# Altium PCB MainPCB.PcbDoc
Units mil, origin at the board's own origin, x right, y up, seen from the top; angles counter-clockwise.
Board outline 3925 x 4850 mil, 2 copper layers (Top Layer, Bottom Layer); 57 components, 67 nets, 338 pads, 15 vias.
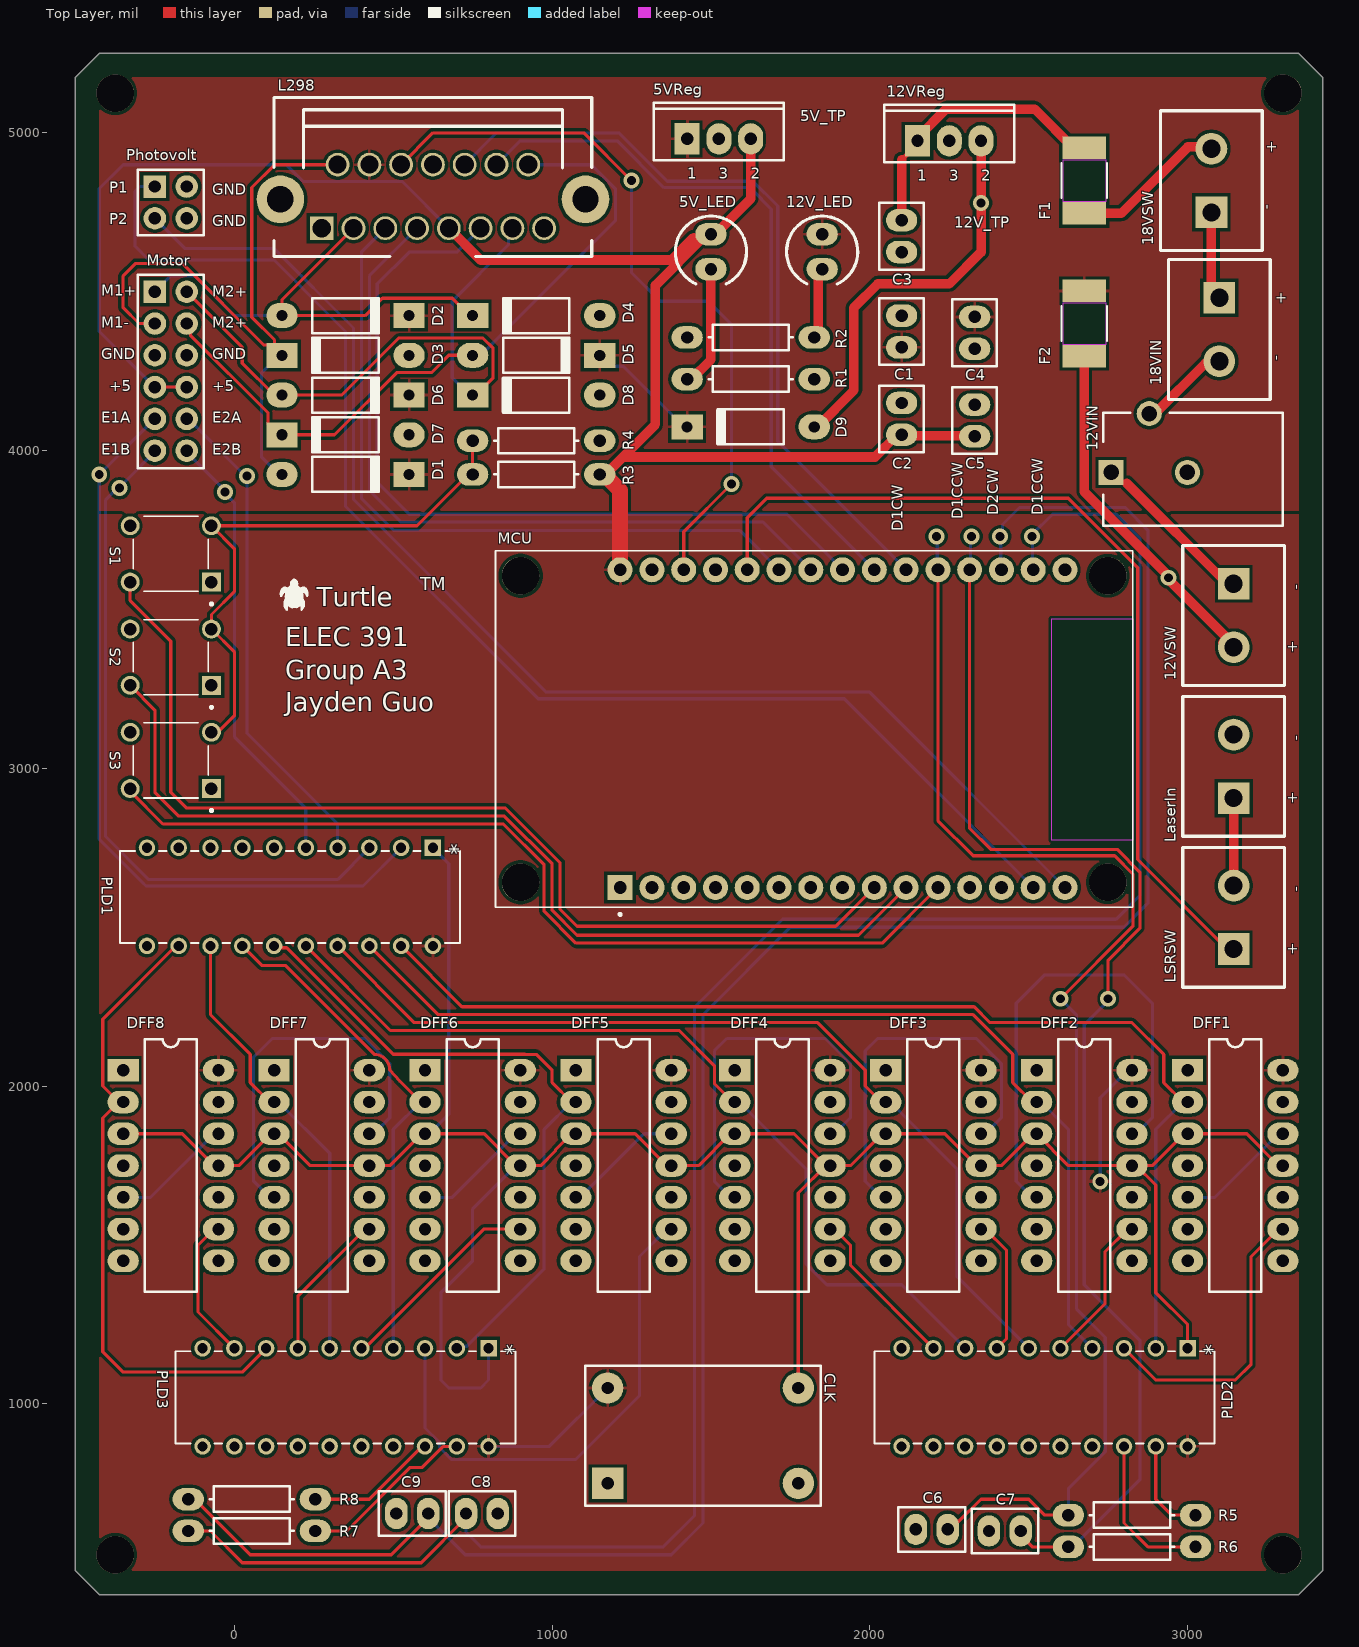
[diagram p0: Top Layer view]
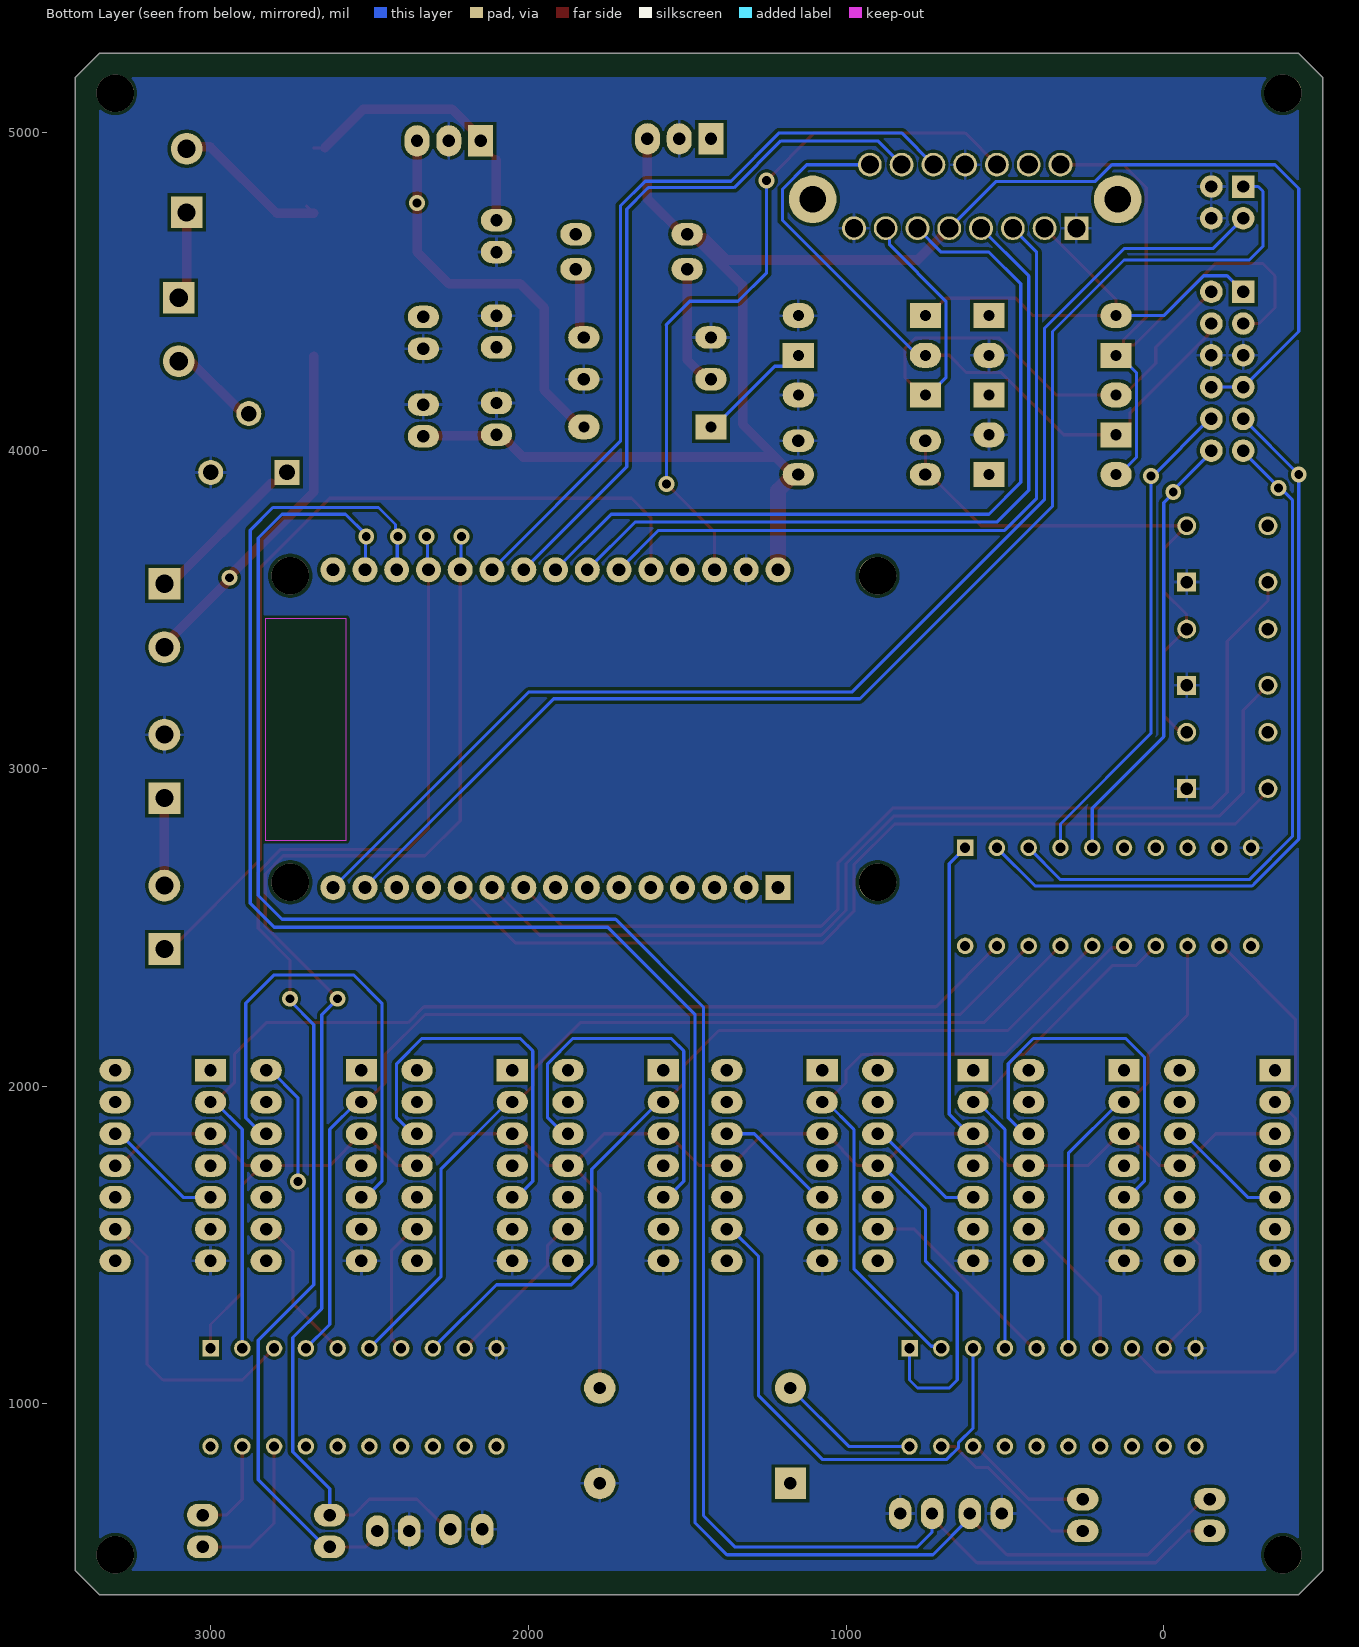
[diagram p1: Bottom Layer view, seen from below]

## Layer stack, top to bottom
Top Solder: solder mask 0.4, Solder Resist, Dk 3.5
Top Layer: signal copper 1.4
Dielectric 1: dielectric 12.6, FR-4, Dk 4.8
Bottom Layer: signal copper 1.4
Bottom Solder: solder mask 0.4, Solder Resist, Dk 3.5

## Board outline
3425,475 3350,400 -425,400 -500,475 -500,5175 -425,5250 3350,5250 3425,5175

## Design rules (kind name [scope] priority, off if disabled: settings)
AssemblyTestPointUsage [All] p1: valid=2
BoardOutlineClearance [All] p1: gap=10 ignorepadtopadclearanceinfootprint=FALSE
Clearance Clearance_5 [All] p1: gap=10 ignorepadtopadclearanceinfootprint=FALSE except(0: Arc-Hole Track-Hole SMDPad-Hole THPad-Hole Via-Hole Fill-Hole Poly-Hole Region-Hole Text-Hole)
Clearance Clearance_4 [All] p2: gap=10 ignorepadtopadclearanceinfootprint=FALSE except(0: Arc-Hole Track-Hole SMDPad-Hole THPad-Hole Via-Hole Fill-Hole Poly-Hole Region-Hole Text-Hole)
Clearance Clearance_3 [All] p3: gap=10 ignorepadtopadclearanceinfootprint=FALSE except(0: Arc-Hole Track-Hole SMDPad-Hole THPad-Hole Via-Hole Fill-Hole Poly-Hole Region-Hole Text-Hole)
Clearance Clearance_2 [All] p4: gap=10 ignorepadtopadclearanceinfootprint=FALSE except(0: Arc-Hole Track-Hole SMDPad-Hole THPad-Hole Via-Hole Fill-Hole Poly-Hole Region-Hole Text-Hole)
Clearance Clearance_1 [All] p5: gap=10 ignorepadtopadclearanceinfootprint=FALSE except(0: Arc-Hole Track-Hole SMDPad-Hole THPad-Hole Via-Hole Fill-Hole Poly-Hole Region-Hole Text-Hole)
Clearance [All] p6: gap=5 ignorepadtopadclearanceinfootprint=FALSE except(0: SMDPad-Hole THPad-Hole Via-Hole Fill-Hole Poly-Hole Region-Hole Text-Hole; 10: Arc-Fill Arc-Poly Arc-Region Track-Fill Track-Poly Track-Region SMDPad-Fill SMDPad-Poly SMDPad-Region THPad-Fill THPad-Poly THPad-Region Via-Fill Via-Poly Via-Region Fill-Fill Fill-Poly Fill-Region Poly-Poly Poly-Region Region-Region)
ComponentClearance [All] p1: gap=0 collisioncheckmode=3 verticalgap=0 showdistances=FALSE
FabricationTestPointUsage [All] p1: valid=2 allowmultiple=FALSE
FabricationTestPointUsage TestPointUsage [All] p2: valid=0 allowmultiple=FALSE
FabricationTestpoint Testpoint [All] p2: side=3 testpointundercomponent=TRUE minsize=40 maxsize=100 preferedsize=60 minholesize=0 maxholesize=40 preferedholesize=32 testpointgrid=1 allowsidetop=TRUE allowsidebottom=TRUE usegrid=TRUE gridtolerance=0.01
Height [All] p1: minheight=0 maxheight=2000 prefheight=500
HoleSize [All] p1: absolutevalues=TRUE maxlimit=1400 minlimit=12 maxpercent=80.000 minpercent=20.000
MinimumAnnularRing MinimumAnnularRing_Vias [IsVia] p1: minimumring=7
MinimumAnnularRing [All] p2: minimumring=7
MinimumSolderMaskSliver [All] p1: minsoldermaskwidth=5
PolygonConnect [All] p1: connectstyle=Relief reliefconductorwidth=10 reliefentries=4 polygonreliefangle="90 Angle" airgapwidth=10
RoutingVias [All] p1: holewidth=25 width=50 viastyle="Through Hole" minholewidth=12 minwidth=26 maxholewidth=25 maxwidth=50
SilkToSilkClearance [All] p1: silktosilkclearance=0
SilkToSolderMaskClearance SilkToCopperClearance [All] p1: minsilkscreentomaskgap=10 clearancetoexposedcopper=TRUE
SilkToSolderMaskClearance [All] p2: minsilkscreentomaskgap=5 clearancetoexposedcopper=FALSE
SilkToSolderMaskClearance SilkscreenOverComponentPads [IsPad] p3: minsilkscreentomaskgap=10 clearancetoexposedcopper=TRUE
SolderMaskExpansion [All] p1: expansion=4 istentingtop=FALSE
Width [All] p1: maxlimit=500 minlimit=5 preferedwidth=10
22 further rules are at their usual default settings.

## Components (designator, comment, footprint, x,y, rotation, side; value= is the part's Value field where it differs from the comment)
5V_LED "G-LED" LED_LGE1.0 1500,4626.25 r270 top
5VReg "Q-VReg5" TO220_XLGE1.2 1525,4981.25 r0 top
12V_LED "G-LED" LED_LGE1.0 1850,4626.25 r270 top
12VIN "C-Pwr" KLD_XLGE1.2 2879.37,4024 r180 top
12VReg "Q-VReg12" TO220_XLGE1.2 2250,4975 r0 top
12VSW "Term-Block 2" TERM-BLOCK-5.08MM-2POS 3145,3381.25 r270 top
18VIN "Term-Block 2" TERM-BLOCK-5.08MM-2POS 3100,4281.25 r270 top
18VSW "Term-Block 2" TERM-BLOCK-5.08MM-2POS 3075,4950 r90 top
C1 "G-Cap" Cap2.54mm_LGE1.0 2100,4375 r270 top value=100nF
C2 "G-Cap" Cap2.54mm_LGE1.0 2100,4100 r90 top value=100nF
C3 "G-Cap" Cap2.54mm_LGE1.0 2100,4675 r270 top value=100nF
C4 "G-Cap" Cap2.54mm_LGE1.0 2330,4370.82 r270 top value=100nF
C5 "G-Cap" Cap2.54mm_LGE1.0 2330,4095 r90 top value=100nF
C6 "G-Cap" Cap2.54mm_LGE1.0 2195,605 r180 top value=100nF
C7 "G-Cap" Cap2.54mm_LGE1.0 2425,600 r180 top value=100nF
C8 "G-Cap" Cap2.54mm_LGE1.0 779.18,655 r0 top value=100nF
C9 "G-Cap" Cap2.54mm_LGE1.0 560,655 r180 top value=100nF
CLK "D-XtalOsc" "4Lead Osc_LGE1.0" 1475,900 r0 top
D1 "1N4148" DO-41_XLGE1.2 350,3925 r0 top
D2 "1N4148" DO-41_XLGE1.2 350,4425 r0 top
D3 "1N4148" DO-41_XLGE1.2 350,4300 r180 top
D4 "1N4148" DO-41_XLGE1.2 950,4425 r180 top
D5 "1N4148" DO-41_XLGE1.2 950,4300 r0 top
D6 "1N4148" DO-41_XLGE1.2 350,4175 r0 top
D7 "1N4148" DO-41_XLGE1.2 350,4050 r180 top
D8 "1N4148" DO-41_XLGE1.2 950,4175 r180 top
D9 "1N4005" DO-41_XLGE1.2 1625,4075 r180 top
DFF1 "D-DFlipFlop" DIP14_LGE1.0 3150,1750 r270 top
DFF2 "D-DFlipFlop" DIP14_LGE1.0 2675,1750 r270 top
DFF3 "D-DFlipFlop" DIP14_LGE1.0 2200,1750 r270 top
DFF4 "D-DFlipFlop" DIP14_LGE1.0 1725,1750 r270 top
DFF5 "D-DFlipFlop" DIP14_LGE1.0 1225,1750 r270 top
DFF6 "D-DFlipFlop" DIP14_LGE1.0 750,1750 r270 top
DFF7 "D-DFlipFlop" DIP14_LGE1.0 275,1750 r270 top
DFF8 "D-DFlipFlop" DIP14_LGE1.0 -200,1750 r270 top
F1 "0ZCG0150BF2C" 0ZCG_BEL 2675,4850 r90 top
F2 "0ZCG0150BF2C" 0ZCG_BEL 2675,4400 r90 top
L298 "Q-LN298HS" Multiwatt15_V_ELEC391HS 625,4900 r0 top value=Value
LaserIn "Term-Block 2" TERM-BLOCK-5.08MM-2POS 3145,3106.25 r90 top
LSRSW "Term-Block 2" TERM-BLOCK-5.08MM-2POS 3145,2631.25 r90 top
MCU "ESP32-DEVKIT-V1" MODULE_ESP32_DEVKIT_V1 1825,3125 r90 top
Motor "C-Hdr2x6" HDR2X6_LGE1.0 -200,4250 r270 top
Photovolt "C-Hdr2x2" HDR2X2_LGE1.0 -200,4781.25 r270 top
PLD1 "ATF16V8B-15PU" 20P3_ATM 625,2750 r270 top
PLD2 "ATF16V8B-15PU" 20P3_ATM 3000,1175 r270 top
PLD3 "ATF16V8B-15PU" 20P3_ATM 800,1175 r270 top
R1 "G-Res" Res10mm_LGE1.0 1625,4225 r180 top value=1K
R2 "G-Res" Res10mm_LGE1.0 1625,4356.25 r0 top value=3K
R3 "G-Res" Res10mm_LGE1.0 950,3925 r0 top value=1K
R4 "G-Res" Res10mm_LGE1.0 950,4031.25 r180 top value=2K
R5 "G-Res" Res10mm_LGE1.0 2825,650 r0 top value=1K
R6 "G-Res" Res10mm_LGE1.0 2825,550 r0 top value=1K
R7 "G-Res" Res10mm_LGE1.0 55,600 r0 top value=1K
R8 "G-Res" Res10mm_LGE1.0 55,700 r0 top value=1K
S1 "TS02-66-60-BK-160-LCR-D" SW_TS02-66-60-BK-160-LCR-D -200,3675 r180 top
S2 "TS02-66-60-BK-160-LCR-D" SW_TS02-66-60-BK-160-LCR-D -200,3350 r180 top
S3 "TS02-66-60-BK-160-LCR-D" SW_TS02-66-60-BK-160-LCR-D -200,3025 r180 top

## Footprints (in the part's own frame and the unit in brackets; to place one, negate y for a bottom-side part, rotate by r counter-clockwise, add the part's x,y. Pads: shape width x height; smd on the part's side, far side on the other; paste and mask are expansions set on the pad)
0ZCG_BEL [mil]
  rect 70x138 smd paste+0 mask+0: 1(-103,0) 2(103,0)
  Top Layer keep-out region: -66,-67 -66,67 66,67 66,-67
  silkscreen extent -55,-72 55,72, body extent -93,-67 93,67, height 61
"4Lead Osc_LGE1.0" [mm] "Double-Pole, Single-Throw Switch; 4 Leads"
  rect 2.5x2.5 hole 0.991: 1(-7.62,-3.81)
  round 2.5 hole 0.991: 7(7.62,-3.81) 8(7.62,3.81) 14(-7.62,3.81)
  silkscreen extent -9.4,-5.59 9.4,5.59
20P3_ATM [mil]
  rect 52x52 / inner round 60 / far side rect 52x52 hole 32 paste-99999 mask+0: 1(0,0)
  round 52 / inner round 60 / far side round 52 hole 32 paste-99999 mask+0: 2(0,-100) 3(0,-200) 4(0,-300) 5(0,-400) 6(0,-500) 7(0,-600) 8(0,-700) 9(0,-800) 10(0,-900) 11(308.74,-900) 12(308.74,-800) 13(308.74,-700) 14(308.74,-600) 15(308.74,-500) 16(308.74,-400) 17(308.74,-300) 18(308.74,-200) 19(308.74,-100) 20(308.74,0)
  silkscreen extent 9,-985 299,85, body extent -5,-980 324,80, height 215
Cap2.54mm_LGE1.0 [mm] "Capacitor, Ceramic, Thru-Hole, Dipped Radial; Body 5.1 x 3.2 mm (WxT) Pin Spacing 2.54 mm (typ)"
  oval 1.8x2.5 hole 0.991: 1(-1.27,0) 2(1.27,0)
  silkscreen extent -2.67,-1.78 2.67,1.78
DIP14_LGE1.0 [mm] "DIP; 14 Leads; Row Spacing 7.62 mm; Pitch 2.54 mm"
  rect 1.8x2.5 hole 0.991: 1(-7.62,-3.81)
  oval 1.8x2.5 hole 0.991: 2(-5.08,-3.81) 3(-2.54,-3.81) 4(0,-3.81) 5(2.54,-3.81) 6(5.08,-3.81) 7(7.62,-3.81) 8(7.62,3.81) 9(5.08,3.81) 10(2.54,3.81) 11(0,3.81) 12(-2.54,3.81) 13(-5.08,3.81) 14(-7.62,3.81)
  silkscreen extent -10.1,-2.08 10.1,2.08, body extent -9.72,-3.93 9.78,3.94, height 5.08
DO-41_XLGE1.2 [mm] "Diode, Axial; Body 5.2 x 2.7 mm (LxDia. max), Lead Dia. 0.86 mm (max)"
  oval 2.5x2 hole 0.889: 1(-5.08,0)
  rect 2.5x2 hole 0.889: 2(5.08,0)
  silkscreen extent -2.65,-1.4 2.75,1.41, body extent -5.44,-1.28 5.49,1.28, height 2.76
HDR2X2_LGE1.0 [mm] "Connector; Header; 2x2 Position"
  rect 1.8x1.8 hole 0.991: 1(-1.27,-1.27)
  round 1.8 hole 0.991: 2(-1.27,1.27) 3(1.27,-1.27) 4(1.27,1.27)
  silkscreen extent -2.63,-2.63 2.63,2.63, body extent -2.55,-2.51 2.54,2.5, height 8.54
HDR2X6_LGE1.0 [mm] "Connector; Header; 6x2 Position"
  rect 1.8x1.8 hole 0.991: 1(-6.35,-1.27)
  round 1.8 hole 0.991: 2(-6.35,1.27) 3(-3.81,-1.27) 4(-3.81,1.27) 5(-1.27,-1.27) 6(-1.27,1.27) 7(1.27,-1.27) 8(1.27,1.27) 9(3.81,-1.27) 10(3.81,1.27) 11(6.35,-1.27) 12(6.35,1.27)
  silkscreen extent -7.71,-2.63 7.75,2.63, body extent -7.59,-2.51 7.65,2.49, height 8.54
KLD_XLGE1.2 [mil] "DC Power Jack, PCB Mount"
  rect 78.74x78.74 hole 49: 1(120,92.5)
  round 78.74 hole 49: 2(-120,92.5) 3(0,-92.5)
  silkscreen extent -420,-95 145,260, body extent -453,-103 145,267, height 434
LED_LGE1.0 [mil] "2.8 mm (typ)"
  oval 70.87x98.43 hole 39: 1(-55,0) 2(55,0)
  silkscreen extent -112,-112 102,112, body extent -118,-120 96,117, height 484
MODULE_ESP32_DEVKIT_V1 [mm]
  rect 2x2 / inner round 2 / far side rect 2x2 hole 1.02: 1(-12.7,15.515)
  round 2 hole 1.02: 2(-12.7,12.975) 3(-12.7,10.435) 4(-12.7,7.895) 5(-12.7,5.355) 6(-12.7,2.815) 7(-12.7,0.275) 8(-12.7,-2.265) 9(-12.7,-4.805) 10(-12.7,-7.345) 11(-12.7,-9.885) 12(-12.7,-12.425) 13(-12.7,-14.965) 14(-12.7,-17.505) 15(-12.7,-20.045) 16(12.7,-20.045) 17(12.7,-17.505) 18(12.7,-14.965) 19(12.7,-12.425) 20(12.7,-9.885) 21(12.7,-7.345) 22(12.7,-4.805) 23(12.7,-2.265) 24(12.7,0.275) 25(12.7,2.815) 26(12.7,5.355) 27(12.7,7.895) 28(12.7,10.435) 29(12.7,12.975) 30(12.7,15.515)
  round 3 hole 3 unplated: ""(-12.28,23.475) ""(-12.28,-23.475) ""(12.23,23.475) ""(12.23,-23.475)
  Keep-Out Layer region: 8.78,-25.475 -8.91,-25.475 -8.91,-18.985 8.78,-18.985
  Keep-Out Layer region: 8.78,-25.475 -8.91,-25.475 -8.91,-18.985 8.78,-18.985
  silkscreen extent -14.95,-25.48 14.23,25.48
Multiwatt15_V_ELEC391HS [mil]
  rect 75x75 hole 57: 1(-350,-200)
  round 75 hole 57: 2(-300,0) 3(-250,-200) 4(-200,0) 5(-150,-200) 6(-100,0) 7(-50,-200) 8(0,0) 9(50,-200) 10(100,0) 11(150,-200) 12(200,0) 13(250,-200) 14(300,0) 15(350,-200)
  round 150 hole 83: 16(480,-109) 17(-480,-109)
  silkscreen extent -500,-289 500,211, body extent -385,-200 387,157, height 826
Res10mm_LGE1.0 [mm] "Axial Device, Thru-Hole; 2 Leads; 0.4 in Pin Spacing"
  oval 2.5x1.8 hole 0.991: 1(-5.08,0) 2(5.08,0)
  silkscreen extent -3.37,-1.02 3.37,1.02
SW_TS02-66-60-BK-160-LCR-D [mm]
  rect 1.508x1.508 hole 1: 1(-3.25,2.25)
  round 1.508 hole 1: 2(3.25,2.25) 3(-3.25,-2.25) 4(3.25,-2.25)
  silkscreen extent -3.35,-3 3,4.1
TERM-BLOCK-5.08MM-2POS [mil] "TERM BLOCK 5.08MM VERT 2POS PCB"
  rect 100x100 hole 57: 1(-200,0)
  round 100 hole 57: 2(0,0)
  silkscreen extent -320,-160 120,160
TO220_XLGE1.2 [mm] "TO, Thru-Hole, Vertical, Heatsink Mounted; 3 In-Line Leads; Pitch 2.54 mm; Pin sequence 1, 3, 2"
  rect 2x2.5 hole 0.991: 1(-2.54,0)
  oval 2x2.5 hole 0.991: 2(2.54,0) 3(0,0)
  silkscreen extent -5.2,-1.71 5.2,2.9

## Part data
5V_LED 12V_LED: "Typical RED, GREEN, YELLOW, AMBER GaAs LED", LatestRevisionDate=17-Jul-2002, LatestRevisionNote="Re-released for DXP Platform.", PackageReference=3.2X1.6X1.1, PackageVersion=Feb-2002, Published=8-Jun-2000, Publisher="Altium Limited"
5VReg: "voltage reg (5V)", ComponentLink1Description="Manufacturer Link", ComponentLink1URL=http://www.onsemi.com/site/products/taxonomy/0,4438,503,00.html, ComponentLink2Description=Datasheet, ComponentLink2URL=http://www.onsemi.com/pub/Collateral/MC78L00A-D.PDF, ComponentLink3Description="Datasheet (ELEC391)", ComponentLink3URL=https://www.fairchildsemi.com/datasheets/LM/LM7805.pdf, DatasheetVersion=Oct-1999, PackageDescription="TO, Flat Index; 3 In-Line, Axial Leads; Body Dia. 4.8mm; Leads 0.48 x 0.51 mm (max)", PackageReference=29-04, PackageVersion=1996, Published=15-Apr-2002, Publisher="Altium Limited"
12VIN: "Low Voltage Power Supply Connector", ComponentLink1Description="Manufacturer Link", ComponentLink1URL=http://domino.kycon.com/internet/Products.html, ComponentLink2Description="Datasheet (ELEC391)", ComponentLink2URL=http://www.cui.com/product/resource/pj-102a.pdf, DatasheetDocument=09-May-2002, Published=17-Dec-2003, Publisher="Altium Limited"
12VReg: "voltage reg (12V)", ComponentLink1Description="Datasheet (ELEC391)", ComponentLink1URL=https://www.fairchildsemi.com/datasheets/LM/LM7805.pdf
12VSW 18VIN 18VSW LaserIn LSRSW: library part C-Block2, "Terminal-Block 1x2", LatestRevisionDate=17-Jul-2002, LatestRevisionNote="Re-released for DXP Platform.", Publisher="Altium Limited"
C1 C2 C3 C4 C5 C6 C7 C8 C9: "Capacitor (specify value)", LatestRevisionDate=17-Jul-2002, LatestRevisionNote="Re-released for DXP Platform.", PackageReference=RAD-0.3, Published=8-Jun-2000, Publisher="Altium Limited"
CLK: "Crystal Oscillator", ComponentLink1Description="Datasheet (ELEC391)", ComponentLink1URL=http://www.ecsxtal.com/store/pdf/ecs_100.pdf, LatestRevisionDate=17-Jul-2002, LatestRevisionNote="Re-released for DXP Platform.", PackageReference=R38, Published=8-Jun-2000, Publisher="Altium Limited"
D1 D2 D3 D4 D5 D6 D7 D8: library part T-DiodeRect, "High-speed Diode", ComponentLink1Description="Datasheet (ELEC391)", ComponentLink1URL=http://www.mccsemi.com/up_pdf/1N4148(DO-35).pdf
D9: library part T-Diode1N4005, "Diode", PackageDocument=Aug-1999, Code_JEDEC=DO-204-AL, ComponentLink1Description="Manufacturer Link", ComponentLink1URL=http://www.fairchildsemi.com/, ComponentLink2Description="Pinout Specification", ComponentLink2URL=http://www.fairchildsemi.com/ds/1N%2F1N4001.pdf, ComponentLink3Description="Datasheet (ELEC391)", ComponentLink3URL=http://www.mccsemi.com/up_pdf/1N4001-1N4007(DO-41).pdf, DatasheetDocument=1998, LatestRevisionDate=17-Jul-2002, LatestRevisionNote="Re-released for DXP Platform.", PackageReference=DO-41, Published=8-Jun-2000, Publisher="Altium Limited"
DFF1 DFF2 DFF3 DFF4 DFF5 DFF6 DFF7 DFF8: "Dual D flip-flop", ComponentLink1Description="Manufacturer Link", ComponentLink1URL=http://www.ti.com/, ComponentLink2Description=Datasheet, ComponentLink2URL=http://www-s.ti.com/sc/ds/sn74f74.pdf, ComponentLink3Description="Datasheet (ELEC391)", ComponentLink3URL=http://www.ti.com/lit/ds/symlink/sn74hct74.pdf, DatasheetVersion=Oct-1993, LatestRevisionDate=04-Mar-2005, LatestRevisionNote="Stylized 3D Model Added.", PackageDescription="DIP; 14 Leads; Row Spacing 7.62 mm; Pitch 2.54 mm", PackageReference=J014, PackageVersion=Jun-1999, Published=8-Jun-2000, Publisher="Altium Limited"
F1 F2: "PTC RESET FUSE 24V 1.5A 1812", Mfr_Name=Belfuse
L298: "LN298 - IC Bridge Driver Par 15Multiwatt", Current - Output / Channel=2A, Current - Peak Output=3A, Manufacturer_Part_Number=L298N, On-State Resistance=-, Operating Temperature="-25Â°C ~ 130Â°C", Package / Case="Multiwatt-15 (Vertical, Bent and Staggered Leads)", Supplier Device Package=15-Multiwatt, Voltage - Supply="4.5 V ~ 46 V", C="Copyright (C) 2015 Accelerated Designs. All rights reserved", ComponentLink1Description="Datasheet (ELEC391)", ComponentLink1URL=http://www.st.com/content/ccc/resource/technical/document/datasheet/82/cc/3f/39/0a/29/4d/f0/CD00000240.pdf/files/CD00000240.pdf/jcr:content/translations/en.CD00000240.pdf, Copyright="Copyright (C) 2015 Accelerated Designs. All rights reserved", DataSheet=http://www.st.com/internet/com/TECHNICAL_RESOURCES/TECHNICAL_LITERATURE/DATASHEET/CD00000240.pdf, Input Type=Non-Inverting, Mounting Type="Through Hole", Number of Outputs=4, Packaging=Tube, Quantity_Available=5651, RefDes=RefDes, Type=Type, Vendor="ST Microelectronics"
MCU: "Dual core, Wi-Fi: 2.4 GHz up to 150 Mbits/s,BLE (Bluetooth Low Energy) and legacy Bluetooth, 32 bits, Up to 240 MHz", Package=None, Availability="Not in stock", Check_prices=https://www.snapeda.com/parts/ESP32-DEVKIT-V1/Do+it/view-part/?ref=eda, MF="Do it", MP=ESP32-DEVKIT-V1, Price=None, SnapEDA_Link=https://www.snapeda.com/parts/ESP32-DEVKIT-V1/Do+it/view-part/?ref=snap
Motor: "Header, 6-Pin, Dual row", LatestRevisionDate=17-Jul-2002, LatestRevisionNote="Re-released for DXP Platform.", Publisher="Altium Limited"
Photovolt: "Header, 2-Pin, Dual row", LatestRevisionDate=17-Jul-2002, LatestRevisionNote="Re-released for DXP Platform.", Publisher="Altium Limited"
PLD1 PLD2 PLD3: "No Description Available", Mfr_Name=Microchip, RefDes=RefDes, Type=Type
R1 R2 R3 R4 R5 R6 R7 R8: "Resistor (specify value)", LatestRevisionDate=29-May-2009, LatestRevisionNote="IPC-7351 Footprint Added.", PackageDescription="Chip Resistor", PackageReference=J1-0603, Published=8-Jun-2000, Publisher="Altium Limited"
S1 S2 S3: "6 x 6 mm, 6 mm Actuator Height, 160 gf, Black, Long Crimped, Through Hole, SPST, Tactile Switch", Package=None, Availability="In Stock", Check_prices=https://www.snapeda.com/parts/TS02-66-60-BK-160-LCR-D/CUI+Devices/view-part/?ref=eda, CUI_purchase_URL=https://www.cuidevices.com/product/switches/tactile-switches/ts02-series?utm_source=snapeda.com&utm_medium=referral&utm_campaign=snapedaBOM, MF="CUI Devices", MP=TS02-66-60-BK-160-LCR-D, Price=None, Purchase-URL=https://pricing.snapeda.com/search/part/TS02-66-60-BK-160-LCR-D/?ref=eda, SnapEDA_Link=https://www.snapeda.com/parts/TS02-66-60-BK-160-LCR-D/CUI+Devices/view-part/?ref=snap

## Free pads (board coordinates)
  round 118.11 hole 118.11: 1(-375,5125) 2(3300,5125) 3(3300,525) 4(-375,525)

## Via types
v1: diameter 50, hole 28, Top Layer to Bottom Layer, 15 vias

## Nets (pads, with @x,y where several pads share a name; then routed paths per layer and width w, separated by ;. In a path a pad name is that pad's centre, name@x,y a point inside that pad or via, vN(x,y) a via of type N, cw(c..) or ccw(c..) an arc to the next point about the centre after c; other vN are vias at no path point)
+5: 5V_LED.1 5VReg.2 C2.1 C5.1 CLK.14 DFF1.14 DFF2.14 DFF3.14 DFF4.14 DFF5.14 DFF6.14 DFF7.14 DFF8.14 L298.9 MCU.30 Motor.7 Motor.8 PLD1.20 PLD2.20 PLD3.20 R3.2 | length 6579.9
  Top Layer w10: Motor.7 Motor.8 ; 1445.57,4670.57 1475.54,4670.57 1486.22,4681.25 5V_LED.1 5V_LED.1@1513.78,4681.25 ; C2.1@2086.22,4050 C2.1 C2.1@2102.5,4047.5 ; C5.1@2327.5,4047.5 C5.1
  Top Layer w30: L298.9 775,4600 1375,4600 1445.57,4670.57 ; R3.2 1163.78,3925 R3.2@1164.53,3925 ; R3.2@1167.53,3925 1325,4082.47 1325,4520.03 1475.54,4670.57 5V_LED.1@1486.22,4681.25 ; 1226.77,3980 2016.22,3980 C2.1@2086.22,4050 ; 5V_LED.1@1513.78,4681.25 1625,4792.47 5VReg.2 ; C2.1@2102.5,4047.5 C5.1@2327.5,4047.5
  Top Layer w50: R3.2@1163.78,3925 1214.17,3874.61 MCU.30
  Bottom Layer w10: Motor.8 Motor.7 -425,4375 -425,4825 -350,4900 163.28,4900 215.78,4847.5 527.5,4847.5 L298.9 ; PLD3.20 991.26,866.26 CLK.14 ; v1(2725,1700) 2725,1963.78 2811.22,2050 DFF2.14
+12: 5VReg.1 12V_LED.1 C1.2 C4.1 D1.2 D2.2 D5.2 D6.2 D9.2 F2.2 L298.4 | length 368.2
  Bottom Layer w10: D5.2 1184.37,4265.63 1224.53,4265.63 1415.16,4075 D9.2
clk: CLK.8 DFF1.3 DFF1.11 DFF2.3 DFF2.11 DFF3.3 DFF3.11 DFF4.3 DFF4.11 DFF5.3 DFF5.11 DFF6.3 DFF6.11 DFF7.3 DFF7.11 DFF8.3 DFF8.11 PLD1.1 PLD2.1 PLD3.1 | length 7682.1
  Top Layer w10: DFF8.3 -163.78,1850 -63.78,1750 DFF8.11 14.21,1750 114.21,1850 DFF7.3 138.78,1850 238.78,1750 DFF7.11 489.21,1750 589.21,1850 DFF6.3 786.22,1850 886.22,1750 DFF6.11 964.21,1750 1010.79,1796.57 1010.79,1799.57 1061.22,1850 DFF5.3 1261.22,1850 1361.22,1750 DFF5.11 1461.22,1750 1561.22,1850 DFF4.3 1761.22,1850 DFF4.11@1861.22,1750 ; CLK.8 1775,1663.78 DFF4.11@1861.22,1750 ; PLD2.1 3000,1250 2900,1350 2900,1688.78 DFF2.11@2838.78,1750 ; DFF1.11 3286.22,1750 3186.22,1850 DFF1.3 2989.21,1850 2889.21,1750 DFF2.11@2838.78,1750 ; DFF4.11@1861.22,1750 DFF4.11 1939.21,1750 2039.21,1850 DFF3.3 2236.22,1850 2336.22,1750 DFF3.11 2414.21,1750 2514.21,1850 DFF2.3 2625,1750 DFF2.11 DFF2.11@2838.78,1750
  Bottom Layer w10: DFF6.3 613.78,1850 675,1911.22 675,2700 PLD1.1 ; PLD3.1@789.86,1164.86 PLD3.1 800,1075 775,1050 675,1050 650,1075 650,1350 750,1450 750,1613.78 886.22,1750 DFF6.11
Dec1CCW: C7.1 MCU.19 R6.1 | length 4063
  Top Layer w10: MCU.19 2314.17,2810.83 2380,2745 2778.76,2745 2850,2673.76 2850,2496.72 2750,2396.72 v1(2750,2275) ; C7.1 2475,586.22 2511.22,550 R6.1
  Bottom Layer w10: MCU.19 2317.09,3627.91 2317.09,3727.09 v1(2320,3730) ; R6.1 2638.78,550 2850,761.22 2850,1200 2675,1375 2675,2193.43 2750,2268.43 v1(2750,2275)
Dec1CW: C6.1 MCU.20 R5.1 | length 4237.9
  Top Layer w10: MCU.20 2214.17,2835.83 2325,2725 2770.48,2725 2827.95,2667.52 2827.95,2502.95 v1(2600,2275) ; C6.1 2270.43,630.43 2280.43,630.43 2350,700 2500,700 2550,650 R5.1
  Bottom Layer w10: v1(2210,3730) 2212.09,3727.91 2212.09,3627.09 MCU.20 ; v1(2600,2275) 2650,2225 2650,1300 2741,1209 2741,849.28 2625,733.28 R5.1
Dec2CCW: C9.1 MCU.18 R8.1 | length 6834.3
  Top Layer w10: R8.1 -125,700 50,525 493.78,525 610,641.22 C9.1
  Bottom Layer w10: C9.1 610,641.22 726.22,525 1375,525 1475,625 1475,2225 1750,2500 2800,2500 2875,2575 2875,3750 2803.83,3821.17 2471.17,3821.17 2417.65,3767.65 2417.65,3737.65 v1(2410,3730) 2412.09,3727.91 2412.09,3627.09 MCU.18
Dec2CW: C8.1 MCU.17 R7.1 | length 6608
  Top Layer w10: R7.1 -75,600 25,500 587.95,500 729.18,641.22 C8.1
  Bottom Layer w10: C8.1 729.18,595.83 775,550 1350,550 1448.36,648.36 1448.36,2248.36 1725,2525 2775,2525 2850,2600 2850,3725 2775,3800 2575,3800 2510,3735 v1(2510,3730) 2512.09,3727.91 2512.09,3627.09 MCU.17
Enable1: L298.6 MCU.28 | length 2336.1
  Top Layer w10: L298.6 625,5000 1100,5000 v1(1250,4850) ; MCU.28 1414.17,3744.57 v1(1564.61,3895)
  Bottom Layer w10: v1(1250,4850) 1250,4560 1340,4470 1491.72,4470 1565.86,4395.86 1564.61,4394.61 v1(1564.61,3895)
Enable2: L298.11 MCU.23 | length 2600.6
  Bottom Layer w10: L298.11 700,4625 550,4625 450,4525 450,3900 550,3800 1739.17,3800 MCU.23
Enc1A: Motor.9 PLD1.2 | length 2456
  Bottom Layer w10: Motor.9 v1(-425,3925) -425,2788.38 -425,2777.35 -291.29,2643.11 -278.18,2630 405,2630 PLD1.2
Enc1B: Motor.11 PLD1.3 | length 2210
  Bottom Layer w10: Motor.11 -250,3996.74 -361.49,3885.25 v1(-361.49,3881.99) -368.01,3881.99 -405,3845 -405,2785.63 -269.37,2650 325,2650 PLD1.3
Enc2A: Motor.10 PLD1.4 | length 1552.6
  Bottom Layer w10: Motor.10 -145,4100 35,3920 v1(40,3920) 40,3110 325,2825 PLD1.4
Enc2B: Motor.12 PLD1.5 | length 1405.3
  Bottom Layer w10: Motor.12 -150,3995 -30,3875 -30,3866.36 0,3836.36 0,3100 225,2875 PLD1.5
  other v1: -30,3870
GND: 5VReg.3 12VIN.2 12VReg.3 C1.1 C2.2 C3.2 C4.2 C5.2 C6.2 C7.2 C8.2 C9.2 CLK.7 D3.1 D4.1 D7.1 D8.1 DFF1.7 DFF2.7 DFF3.7 DFF4.7 DFF5.7 DFF6.7 DFF7.7 DFF8.7 L298.1 L298.8 L298.15 LaserIn.2 MCU.2 MCU.29 Motor.5 Motor.6 Photovolt.2 Photovolt.4 PLD1.10 PLD2.10 PLD3.10 R1.1 R2.1 R4.1 S1.1 S2.1 S3.1
Home1: MCU.9 S1.2 | length 3239.6
  Top Layer w10: S1.2 -327.95,3527.95 -200,3400 -200,2925 -150,2875 853.28,2875 1025,2703.28 1025,2556.57 1078.28,2503.28 1892.46,2503.28 MCU.9
Home2: MCU.10 S2.2 | length 3067.4
  Top Layer w10: S2.2 -250,3183.46 -250,2925 -175,2850 850,2850 1000,2700 1000,2553.28 1078.28,2475 1964.17,2475 MCU.10
Home3: MCU.11 S3.2 | length 2907
  Top Layer w10: S3.2 -327.95,2927.95 -225,2825 846.72,2825 975,2696.72 975,2550 1075,2450 2039.17,2450 MCU.11
IN1: L298.5 MCU.25 | length 2288.4
  Bottom Layer w10: L298.5 400,4625 400,3850 500.92,3749.08 1590.1,3749.08 MCU.25
IN2: L298.7 MCU.24 | length 2379.9
  Bottom Layer w10: L298.7 425,4550 425,3875 525,3775 1664.17,3775 MCU.24
IN3: L298.10 MCU.21 | length 2434.1
  Bottom Layer w10: L298.10 825,5000 1210,5000 1362.03,4847.97 1632.03,4847.97 1710,4770 1710,4029.17 MCU.21
IN4: L298.12 MCU.22 | length 2254.4
  Bottom Layer w10: L298.12 900,4975 1205,4975 1352.03,4827.97 1622.03,4827.97 1629.49,4820.51 1690,4760 1690,3949.17 MCU.22
Laser: LSRSW.1 MCU.26 | length 2826.1
  Top Layer w10: MCU.26 1614.17,3789.17 1675,3850 2625,3850 2842.95,3632.05 2842.95,2713.29 LSRSW.1@3125,2431.25
M1+: D2.1 D4.2 L298.3 Motor.1 | length 1486.1
  Top Layer w10: L298.3 150,4475 D2.1 411.51,4425 465.88,4479.37 685.79,4479.37 740.16,4425 D4.2
  Bottom Layer w10: Motor.1 -199.57,4550.43 -125.43,4550.43 0,4425 D2.1
M1-: D1.1 D3.2 L298.2 Motor.3 | length 2140.4
  Top Layer w10: Motor.3 -300,4400 -350,4450 -350,4550 -310.81,4589.19 -164.19,4589.19 92.6,4332.4 117.6,4332.4 D3.2@126.49,4323.51 ; D1.1@140.16,3925 D1.1 ; D3.2 D3.2@126.49,4323.51 ; L298.2 126.72,4900 55,4828.28 55,4420 126.49,4348.51 D3.2@126.49,4323.51
  Bottom Layer w10: D1.1 140.16,3925 85.79,3979.37 85.79,4245.63 140.16,4300 D3.2
M1_A_HIGH: DFF2.2 PLD1.18 PLD2.4 | length 3211.1
  Top Layer w10: PLD1.18 641.26,2225 2325,2225 2450,2100 2450,2011.22 2511.22,1950 DFF2.2
  Bottom Layer w10: DFF2.2 2538.78,1950 2625,1863.78 2625,1250 PLD2.4
M1_A_HIGH_PREV: DFF2.9 PLD2.5 | length 476.3
  Top Layer w10: PLD2.5 2740,1315 2740,1478.78 2811.22,1550 DFF2.9
M1_AB_HIGH: DFF1.2 PLD1.19 PLD2.2 | length 3555
  Top Layer w10: PLD1.19 716.26,2250 2328.28,2250 2378.28,2200 2825,2200 2925,2100 2925,2011.22 2986.22,1950 DFF1.2
  Bottom Layer w10: PLD2.2 2900,1863.78 2986.22,1950 DFF1.2
M1_AB_HIGH_PREV: DFF1.9 PLD2.3 | length 936.6
  Top Layer w10: PLD2.3 2900,1075 3150,1075 3200,1125 3200,1463.78 3286.22,1550 DFF1.9
M1_AB_LOW: DFF4.2 PLD1.16 PLD2.8 | length 2837.6
  Top Layer w10: PLD1.16 491.26,2175 1400,2175 1510.79,2064.21 1510.79,2008.35 1569.14,1950 DFF4.2 DFF4.2@1553.61,1971.39
  Bottom Layer w10: DFF4.2 1588.78,1950 1800,1738.78 1800,1439.9 1864.9,1375 2100,1375 PLD2.8
M1_AB_LOW_PREV: DFF4.9 PLD2.9 | length 517.7
  Top Layer w10: DFF4.9 1888.78,1550 1939.21,1499.57 1939.21,1435.79 PLD2.9
M1_B_HIGH: DFF3.2 PLD1.17 PLD2.6 | length 2927
  Top Layer w10: PLD1.17 566.26,2200 1835.79,2200 1985.79,2050 1985.79,2000.43 2036.22,1950 DFF3.2
  Bottom Layer w10: DFF3.2 2063.78,1950 2275,1738.78 2275,1400 PLD2.6
M1_B_HIGH_PREV: DFF3.9 PLD2.7 | length 428.6
  Top Layer w10: DFF3.9 2363.78,1550 2430,1483.78 2430,1205 PLD2.7
M2+: D6.1 D8.2 L298.13 Motor.2 | length 2031.2
  Top Layer w10: Motor.2 25,4325 25,4275 125,4175 338.27,4175 517.64,4354.37 782.36,4354.37 814.21,4322.52 814.21,4229.37 759.84,4175 D8.2
  Bottom Layer w10: D8.2 740.16,4175 685.79,4229.37 685.79,4470.58 862.7,4647.5 862.7,4687.7 L298.13
M2-: D5.1 D7.2 L298.14 Motor.4 | length 2214.7
  Top Layer w10: Motor.4 -138.35,4388.35 -138.35,4363.35 105.79,4119.21 105.79,4084.37 140.16,4050 D7.2 315.2,4050 510.83,4245.63 620.63,4245.63 675,4300 D5.1
  Bottom Layer w10: D5.1 775,4300 1200,4725 1200,4823.28 1123.28,4900 L298.14
M2_A_HIGH: DFF6.2 PLD1.14 PLD3.4 | length 1611.6
  Top Layer w10: PLD1.14 86.26,2380 160.22,2380 439.79,2100.42 cw(c438.78,2050) 489.2,2051.01 520.22,2016 523.14,2013.08 586.22,1950 DFF6.2
  Bottom Layer w10: PLD3.4 500,1863.78 586.22,1950 DFF6.2
M2_A_HIGH_PREV: DFF6.9 PLD3.5 | length 655.3
  Top Layer w10: PLD3.5 410.1,1175 785.1,1550 DFF6.9
M2_AB_HIGH: DFF5.2 PLD1.15 PLD3.2 | length 2129.1
  Top Layer w10: PLD1.15 130.73,2435.53 164.47,2435.53 499.57,2100.43 913.78,2100.43 cw(c913.78,2050) 914.46,2100.43 949.96,2100 ; 950,2100 952.93,2097.07 1000,2050 1000,2011.22 1061.22,1950 DFF5.2
  Bottom Layer w10: PLD3.2 706.49,1181.49 731.49,1181.49 975,1425 975,1863.78 1061.22,1950 DFF5.2
M2_AB_HIGH_PREV: DFF5.9 PLD3.3 | length 1633.3
  Bottom Layer w10: PLD3.3 600,924.24 645.53,878.72 645.53,862.75 683.02,825.26 1075.26,825.26 1275,1025 1275,1463.78 1361.22,1550 DFF5.9
M2_AB_LOW: DFF8.2 PLD1.12 PLD3.8 | length 2008.7
  Top Layer w10: DFF8.2 DFF8.2@-363.78,1950 ; PLD1.12 -183.74,2441.26 -414.21,2210.79 -414.21,2000.43 DFF8.2@-363.78,1950 ; PLD3.8 25,1100 -350,1100 -414.21,1164.21 -414.21,1899.57 DFF8.2@-363.78,1950
M2_AB_LOW_PREV: DFF8.9 PLD3.9 | length 457
  Top Layer w10: DFF8.9 -63.78,1550 -114.21,1499.57 -114.21,1289.21 PLD3.9
M2_B_HIGH: DFF7.2 PLD1.13 PLD3.6 | length 1437.7
  Top Layer w10: PLD1.13 -75,2225 50,2100 50,2011.22 111.22,1950 DFF7.2
  Bottom Layer w10: DFF7.2 138.78,1950 300,1788.78 PLD3.6
M2_B_HIGH_PREV: DFF7.9 PLD3.7 | length 476.3
  Top Layer w10: PLD3.7 200,1338.78 411.22,1550 DFF7.9
Net5V_LED_2: 5V_LED.2 R1.2 | length 385.4
  Top Layer w10: R1.2 R1.2@1438.78,4225
  Top Layer w30: R1.2@1438.78,4225 1500,4286.22 5V_LED.2
Net12V_LED_2: 12V_LED.2 R2.2 | length 225.4
  Top Layer w10: R2.2 R2.2@1837.5,4368.75 ; 12V_LED.2@1837.5,4558.75 12V_LED.2
  Top Layer w30: R2.2@1837.5,4368.75 12V_LED.2@1837.5,4558.75
Net12VIN_1: 12VIN.1 12VSW.1 | length 510.7
  Top Layer w10: 12VIN.1 2793.74,3897.13 2809.11,3897.13
  Top Layer w30: 2809.11,3897.13 12VSW.1@3125,3581.25
Net12VIN_3: 12VIN.3 18VIN.2 | length 300.5
  Top Layer w10: 12VIN.3@2868.94,4116.5 12VIN.3 12VIN.3@2897.93,4116.5 ; 18VIN.2@3056.44,4275 18VIN.2@3075,4275 ; 18VIN.2@3075,4272.13 3090.88,4272.13 18VIN.2
  Top Layer w30: 12VIN.3@2897.93,4116.5 18VIN.2@3056.44,4275
Net12VReg_1: 12VReg.1 C3.1 F1.2 | length 893.4
  Top Layer w10: 12VReg.1@2150,4965.16 12VReg.1 12VReg.1@2150,4984.84 ; F1.2@2641,4953 F1.2
  Top Layer w14: 2100,4915.16 12VReg.1@2150,4965.16
  Top Layer w30: C3.1 2100,4915.16 ; 12VReg.1@2150,4984.84 2240.16,5075 2519,5075 F1.2@2641,4953
Net12VReg_2: 12VReg.2 D9.1 | length 1255
  Top Layer w10: D9.1 D9.1@1834.84,4075
  Top Layer w30: D9.1@1834.84,4075 1950,4190.16 1950,4450 2025,4525 2250,4525 2350,4625 v1(2350,4780) 12VReg.2
Net12VSW_2: 12VSW.2 F2.1 | length 1131.3
  Top Layer w10: 12VSW.2@3110.91,3395.33 12VSW.2@3125,3381.25
  Top Layer w30: F2.1 2675,3870.19 2940,3605.19 2940,3594.59 3145,3389.59 12VSW.2 ; 12VSW.2@3110.91,3395.33 12VSW.2@3111.6,3396.02
  other v1: 2940,3600
Net18VIN_1: 18VIN.1 18VSW.1 | length 235
  Top Layer w30: 18VIN.1@3069.54,4510 18VIN.1@3070.39,4510.85 ; 18VIN.1@3075,4516.25 18VSW.1
Net18VSW_2: 18VSW.2 F1.1 | length 520.4
  Top Layer w10: F1.1 F1.1@2697,4769 ; 18VSW.2@3068.75,4956.25 18VSW.2
  Top Layer w30: F1.1 2791.7,4747 3000.95,4956.25 18VSW.2@3068.75,4956.25
NetDFF1_5: DFF1.5 DFF1.12 | length 396.6
  Bottom Layer w10: DFF1.5@2986.22,1650 DFF1.5 3086.22,1650 3286.22,1850 DFF1.12
NetDFF2_5: DFF2.5 DFF2.12 | length 1593.2
  Bottom Layer w10: DFF2.5 2511.22,1650 2460.79,1700.43 2460.79,2260.79 2550,2350 2800,2350 2889.21,2260.79 2889.21,1900.43 2838.78,1850 DFF2.12
NetDFF3_5: DFF3.5 DFF3.12 | length 1228.5
  Bottom Layer w10: DFF3.5 2036.22,1650 1985.79,1700.43 1985.79,2110.79 2025,2150 2335.1,2150 2414.21,2070.89 2414.21,1900.43 2363.78,1850 DFF3.12
NetDFF4_5: DFF4.5 DFF4.12 | length 1228.5
  Bottom Layer w10: DFF4.5 1561.22,1650 1510.79,1700.43 1510.79,2110.79 1550,2150 1860.1,2150 1939.21,2070.89 1939.21,1900.43 1888.78,1850 DFF4.12
NetDFF5_5: DFF5.5 DFF5.12 | length 382.8
  Bottom Layer w10: DFF5.5 1088.78,1650 1288.78,1850 DFF5.12
NetDFF6_5: DFF6.5 DFF6.12 | length 382.8
  Bottom Layer w10: DFF6.5 686.22,1650 886.22,1850 DFF6.12
NetDFF7_5: DFF7.5 DFF7.12 | length 1217.2
  Bottom Layer w10: DFF7.5 111.22,1650 60.79,1700.43 60.79,2091.65 119.14,2150 410.1,2150 489.21,2070.89 489.21,1900.43 438.78,1850 DFF7.12
NetDFF8_5: DFF8.5 DFF8.12 | length 382.8
  Bottom Layer w10: DFF8.5 -263.78,1650 -63.78,1850 DFF8.12
NetLaserIn_1: LaserIn.1 LSRSW.2 | length 275
  Top Layer w30: LSRSW.2 LaserIn.1
NetPLD2_18: PLD2.18 R6.2 | length 497.3
  Top Layer w10: PLD2.18 2800,625 2875,550 R6.2
NetPLD2_19: PLD2.19 R5.2 | length 312
  Top Layer w10: PLD2.19 2900,700 2950,650 R5.2
NetPLD3_18: PLD3.18 R8.2 | length 413.9
  Top Layer w10: R8.2 425,700 591.26,866.26 PLD3.18
NetPLD3_19: PLD3.19 R7.2 | length 555.3
  Top Layer w10: R7.2 353.28,600 553.28,800 591.72,800 657.98,866.26 PLD3.19
NetR3_1: R3.1 R4.2 S1.3 S2.3 S3.3 | length 1776.2
  Top Layer w10: S3.3 -62.6,3123.03 -42.62,3123.03 0,3165.65 0,3366.54 S2.3 -72.05,3484.21 0,3556.25 0,3691.54 S1.3 574.8,3763.58 736.22,3925 R3.1 R4.2
Photovoltaic1: MCU.14 Photovolt.1 | length 4226.2
  Bottom Layer w10: Photovolt.1 -297.12,4831.25 -312.42,4815.95 -312.42,4643.28 -269.14,4600 125,4600 350,4375 350,3825 955.92,3219.08 1920.1,3219.08 MCU.14
Photovoltaic2: MCU.15 Photovolt.3 | length 4052.5
  Bottom Layer w10: Photovolt.3 -154.76,4636 125,4636 375,4386 375,3846.72 981.78,3239.93 1999.24,3239.93 MCU.15
pads on no net: CLK.1 DFF1.1 DFF1.4 DFF1.6 DFF1.8 DFF1.10 DFF1.13 DFF2.1 DFF2.4 DFF2.6 DFF2.8 DFF2.10 DFF2.13 DFF3.1 DFF3.4 DFF3.6 DFF3.8 DFF3.10 DFF3.13 DFF4.1 DFF4.4 DFF4.6 DFF4.8 DFF4.10 DFF4.13 DFF5.1 DFF5.4 DFF5.6 DFF5.8 DFF5.10 DFF5.13 DFF6.1 DFF6.4 DFF6.6 DFF6.8 DFF6.10 DFF6.13 DFF7.1 DFF7.4 DFF7.6 DFF7.8 DFF7.10 DFF7.13 DFF8.1 DFF8.4 DFF8.6 DFF8.8 DFF8.10 DFF8.13 L298.16 L298.17 MCU. MCU.1 MCU.3 MCU.4 MCU.5 MCU.6 MCU.7 MCU.8 MCU.12 MCU.13 MCU.16 MCU.27 PLD1.6 PLD1.7 PLD1.8 PLD1.9 PLD1.11 PLD2.11 PLD2.12 PLD2.13 PLD2.14 PLD2.15 PLD2.16 PLD2.17 PLD3.11 PLD3.12 PLD3.13 PLD3.14 PLD3.15 PLD3.16 PLD3.17 S1.4 S2.4 S3.4

## Polygon pours and split planes (outlines as drawn)
+12 on Top Layer "+12_L01_P001" (solid, pour order 1): -425,3800 3350,3800 3350,5175 -425,5175
+5 on Top Layer "+5_L01_P000" (solid, pour order 0): -425,475 3350,475 3350,3800 -425,3800
GND on Bottom Layer "GND_L02_P002" (solid, pour order 2): -425,475 3350,475 3350,5175 -425,5175

## Silkscreen, mask and mechanical layers (free items; w line width, h text height)
Top Overlay:
  region: 355 vertices and 0 holes, not listed, extent 143.33,3496.67 233.33,3596.67
  text "5V_TP" at 1781,5036.83 h35
  text "+" at 3250.17,4975.25 h35 r270
  text "P1" at -394,4812.25 h35
  text "GND" at -69,4806 h35
  text "-" at 3238.5,4775.25 h35 r270
  text "P2" at -394,4712.25 h35
  text "GND" at -69,4706 h35
  text "12V_TP" at 2266,4701.83 h35
  text "+" at 3280.17,4500.25 h35 r270
  text "M1+" at -419,4487.25 h35
  text "M2+" at -70.06,4484.39 h35
  text "M1-" at -419,4387.25 h35
  text "M2+" at -69,4387.25 h35
  text "-" at 3268.5,4300.25 h35 r270
  text "GND" at -419,4287.25 h35
  text "GND" at -69,4287.25 h35
  text "+5" at -394,4187.25 h35
  text "+5" at -69,4187.25 h35
  text "E1A" at -419,4087.25 h35
  text "E2A" at -69,4087.25 h35
  text "E1B" at -419,3987.25 h35
  text "E2B" at -69,3987.25 h35
  text "D2CW" at 2404,3796 h35 r90
  text "D1CCW" at 2544,3796 h35 r90
  text "D1CCW" at 2292.51,3784.01 h35 r90
  text "D1CW" at 2104,3746 h35 r90
  text "-" at 3356.49,3562.25 h35 r90
  text "TM" at 585,3560 h40
  text "Turtle" at 260,3510 h60
  text "ELEC 391" at 160,3385 h60
  text "+" at 3344.83,3362.25 h35 r90
  text "Group A3" at 160,3279.99 h60
  text "Jayden Guo" at 160,3179.99 h60
  text "-" at 3356.49,3087.25 h35 r90
  text "+" at 3344.83,2887.25 h35 r90
  text "-" at 3356.49,2612.25 h35 r90
  text "+" at 3344.83,2412.25 h35 r90
Mechanical 1:
  the board outline again, w10

## Text inside footprints (layer, text, board x,y; h text height)
5VReg: Top Overlay "1" at 1425,4856.25 h35; Top Overlay "2" at 1625,4856.25 h35; Top Overlay "3" at 1525,4856.25 h35
12VReg: Top Overlay "1" at 2150,4850 h35; Top Overlay "2" at 2350,4850 h35; Top Overlay "3" at 2250,4850 h35
PLD1: Top Overlay "*" at 656,2762.5 h50 r270; Top 3D Body "*" at 600,2738.13 h50 r270
PLD2: Top Overlay "*" at 3031,1187.5 h50 r270; Top 3D Body "*" at 2975,1163.13 h50 r270
PLD3: Top Overlay "*" at 831,1187.5 h50 r270; Top 3D Body "*" at 775,1163.13 h50 r270